# EAGLE board v0 (EAGLE 8.3.2)
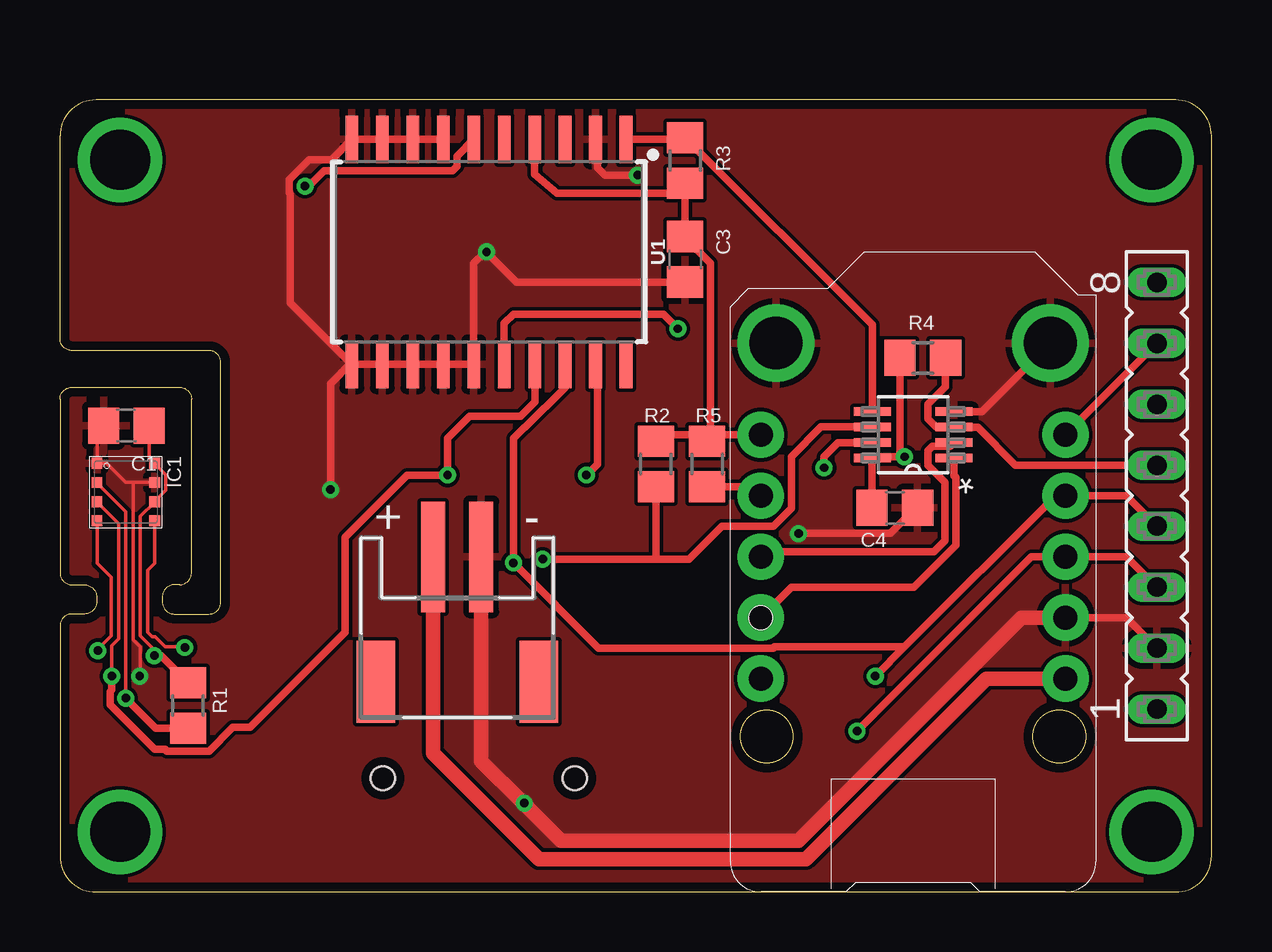
[diagram p0: board, top side]
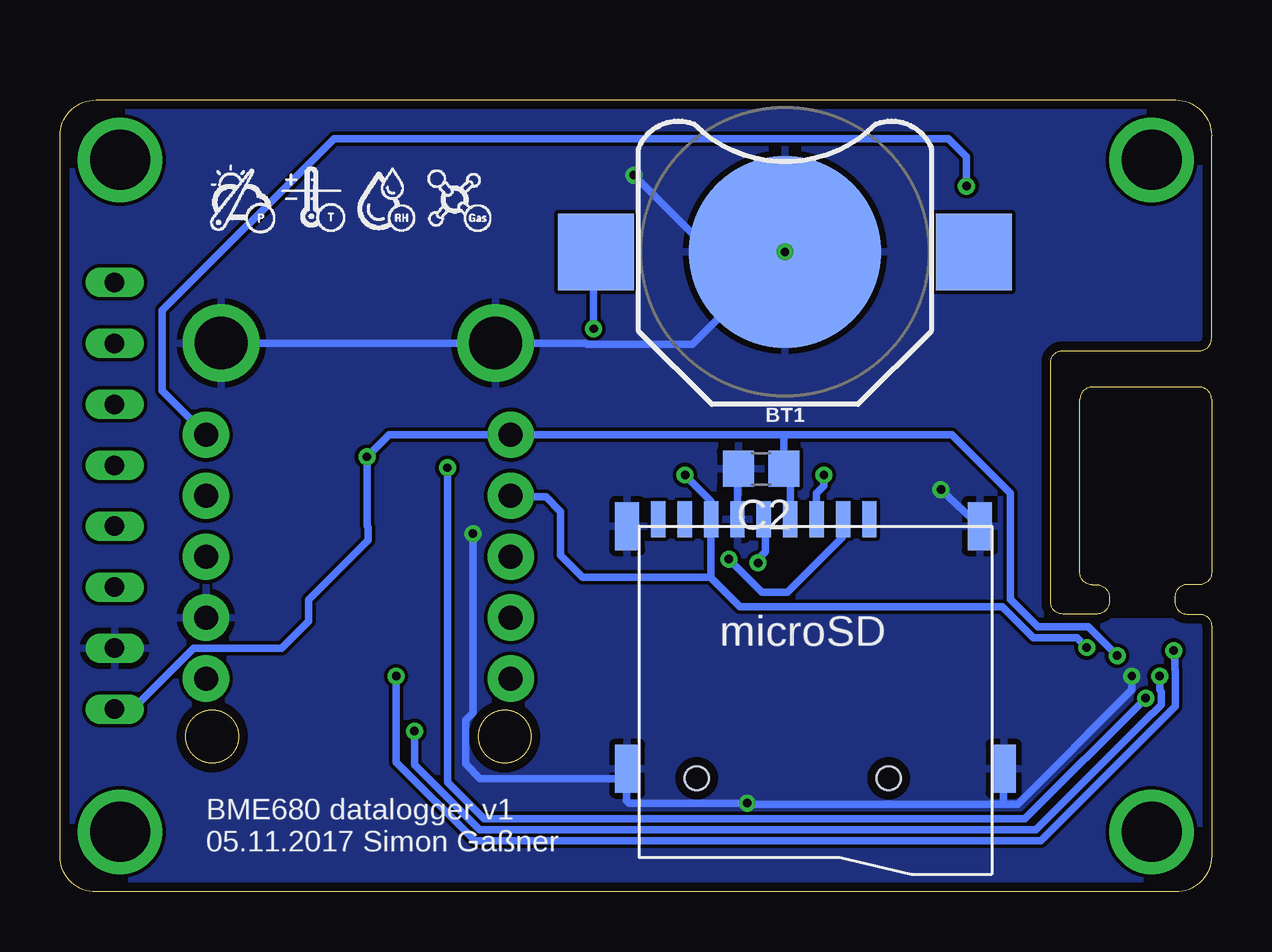
[diagram p1: board, bottom side, seen from below]

Size 48 x 33 mm. Coordinates in mm from the lower left corner, seen from the top.
Outline: 6.21,22.55 0.5,22.55 arc-90 0,23.05 0,31.5 arc-90 1.5,33 46.5,33 arc-90 48,31.5 48,1.5 arc-90 46.5,0 1.5,0 arc-90 0,1.5 0,11.08 arc-90 0.5,11.58 1.02,11.58 arc90 1.52,12.08 1.52,12.3 arc90 1.02,12.8 0.5,12.8 arc-90 0,13.3 0,20.53 arc-90 0.5,21.03 4.99,21.03 arc-90 5.49,20.53 5.49,13.3 arc-90 4.99,12.8 4.77,12.8 arc90 4.27,12.3 4.27,12.08 arc90 4.77,11.58 6.21,11.58 arc90 6.71,12.08 6.71,22.05 arc90 6.21,22.55
Copper layers (1*16): Top 0.0356mm / dielectric 1.5011mm / Bottom 0.0356mm
Design rules "oshpark-2layer *": minimum track width 6mil, minimum drill 13mil, track to track 6mil, track to pad 6mil, pad to pad 6mil, via to via 6mil, smd to smd 6mil, copper to edge 15mil, drill to drill 6mil, minimum pad ring 7mil, minimum via ring 7mil, stop-mask expansion 2.5mil, vias tented up to drill 14mil, thermal gap 10mil
bRestrict: area 0,11.6 to 5.5,21

## Footprints (pad centres in the part's own frame; a part is rotated, then mirrored left to right if it is on the bottom)
BATTCON_12MM = smd 8 x 8: GND 0,0 | smd 3.175 x 3.175: PWR@1 -7.874,0; PWR@2 7.874,0
C0805 = smd 1.3 x 1.5: 1 -0.95,0; 2 0.95,0
JST-PH-2-SMT-RA = smd 1 x 4.6: 1 1,-3.7; 2 -1,-3.7 | smd 1.6 x 3.4: NC1 -3.4,1.5; NC2 3.4,1.5
BME680 = smd 0.45 x 0.45: 1 -1.2,-1.2; 2 -0.4,-1.2; 3 0.4,-1.2; 4 1.2,-1.2; 5 1.2,1.2; 6 0.4,1.2; 7 -0.4,1.2; 8 -1.2,1.2
R0805 = smd 1.3 x 1.5: 1 -0.95,0; 2 0.95,0
FE08 = drill 0.813 long: 1 -8.89,0; 2 -6.35,0; 3 -3.81,0; 4 -1.27,0; 5 1.27,0; 6 3.81,0; 7 6.35,0; 8 8.89,0
SO20-0.3 = smd 0.53 x 1.98: 1 -5.715,-4.685; 2 -4.445,-4.685; 3 -3.175,-4.685; 4 -1.905,-4.685; 5 -0.635,-4.685; 6 0.635,-4.685; 7 1.905,-4.685; 8 3.175,-4.685; 9 4.445,-4.685; 10 5.715,-4.685; 11 5.715,4.685; 12 4.445,4.685; 13 3.175,4.685; 14 1.905,4.685; 15 0.635,4.685; 16 -0.635,4.685; 17 -1.905,4.685; 18 -3.175,4.685; 19 -4.445,4.685; 20 -5.715,4.685
SOP65P400X130-8N = smd 1.549 x 0.356: 1 -1.702,0.965; 2 -1.702,0.33; 3 -1.702,-0.33; 4 -1.702,-0.965; 5 1.702,-0.965; 6 1.702,-0.33; 7 1.702,0.33; 8 1.702,0.965
MR**-AP*03** = smd 0.6 x 1.5: CARD_DETECTION -6.55,0.3; CLK -2.15,0.3; CMD 0.05,0.3; DAT0 -4.35,0.3; DAT1 -5.45,0.3; DAT2 2.25,0.3; DAT3/CS 1.15,0.3; GND -3.25,0.3; VCC -1.05,0.3 | smd 1 x 2: SHD_1 -7.85,0; SHD_2 6.85,0; SHD_3 -7.85,-10.1; SHD_4 7.85,-10.1 | hole 1: -4.95,-10.5; 3.05,-10.5
TRINKET_M0 = drill 1 pad 1.93: 1 -6.35,3.81; 2 -6.35,1.27; 3 -6.35,-1.27; 4 -6.35,-3.81; 5 -6.35,-6.35; 6 6.35,-6.35; 7 6.35,-3.81; 8 6.35,-1.27; 9 6.35,1.27; 10 6.35,3.81 | drill 2.2: 11 -5.715,-10.173; 12 5.715,-10.173

## Placement (x,y rotation side)
BT1  [BATTCON_12MM]  17.78,26.67 0 bottom
C1  100n  [C0805]  2.77,19.43 180 top
C2  100n  [C0805]  18.77,17.63 180 bottom
C3  100n  [C0805]  26.06,26.37 270 top
C4  100n  [C0805]  34.8,16 0 top
CN1  [JST-PH-2-SMT-RA]  16.56,10.26 180 top
IC1  BME680  [BME680]  2.74,16.66 270 top
R1  10k  [R0805]  5.33,7.77 90 top
R2  10k  [R0805]  24.84,17.83 90 top
R3  10k  [R0805]  26.06,30.48 270 top
R4  10k  [R0805]  35.97,22.25 180 top
R5  10k  [R0805]  26.97,17.83 90 top
SV1  [FE08]  45.72,16.51 90 top
U1  DS3234  [SO20-0.3]  17.88,26.67 180 top
U2  SN74LVC1G139DCTR  [SOP65P400X130-8N]  35.56,19.05 180 top
U$1  MICROSD_CARD_POLLIN  [MR**-AP*03**]  16.51,15.24 0 bottom
U$8  TRINKET_M0  [TRINKET_M0]  35.56,12.7 180 top
U$14  [BME680_LOGO]  41.91,27.28 0 bottom

## Library data of the parts
BT1 = SparkFun-Batteries; PROD_ID: BATT-08044; SF_SKU: PRT-10592
C1-C4 R1-R5 = rcl
CN1 = adafruit
IC1 = bosch-bme680
SV1 = con-lsta; OC_FARNELL: unknown; OC_NEWARK: unknown
U1 = SparkFun-Clocks; PROD_ID: IC-10016; SF_ID: COM-10079
U2 = 000_Simons_Eigene; MPN: SN74LVC1G139DCTR; OC_FARNELL: Unknown; OC_NEWARK: 94T5046; PACKAGE: SSOP-8; SUPPLIER: TEXAS INSTRUMENTS
U$1 = 000_eigene_Bauteile
U$8 U$14 = 000_Simons_Eigene

## Nets
3.3V: C1.1 C2.1 C3.1 C4.1 IC1.6 IC1.8 R1.2 R2.2 R3.2 R4.2 R5.2 SV1.1 U1.4 U2.8 U$1.VCC U$8.6
CS0: IC1.2 R1.1 U2.7
CS1: R2.1 U2.6 U$1.DAT3/CS
CS2: R3.1 U1.1 U2.5
CS3: R4.1 SV1.5 U2.3
CSD0: U2.1 U$8.9
CSD1: U2.2 U$8.8
GND: BT1.GND C1.2 C2.2 C3.2 C4.2 CN1.2 IC1.1 IC1.7 SV1.2 U1.2 U1.7 U1.8 U1.9 U1.10 U1.11 U1.12 U1.13 U1.14 U1.15 U2.4 U$1.GND U$1.SHD_1 U$1.SHD_2 U$1.SHD_3 U$1.SHD_4 U$8.2 U$8.11 U$8.12
MISO: IC1.5 R5.1 U1.19 U$1.DAT0 U$8.7
MOSI: IC1.3 SV1.3 U1.17 U$1.CMD U$8.3
N$1: BT1.PWR@1 U1.16
RST: SV1.7 U1.6 U$8.5
SCK: IC1.4 SV1.4 U1.18 U$1.CLK U$8.4
V_BAT: CN1.1 U$8.1

## Tracks (layer width: path | path; a pad name or v marks a point on that pad's centre or on a via)
3.3V  (via drill 0.35)
  Top 0.152: C1.1 3.72,18.09 IC1.8 3.94,17.84 4.4,17.38 4.4,16.74 3.94,16.29 IC1.6 3.94,16.24 3.35,15.64 3.35,10.67 3.96,10.06 3.93,10.03 v3.93,9.85
  Top 0.305: C4.1 33.85,18.07 U2.8 33.91,18.14 v35.2,18.14 35.02,18.32 R4.2 | 27.24,19.05 R5.2 | 27.24,19.05 U$8.6 | R1.2 4.21,9.85 v3.93,9.85 | R2.2 25.11,19.05 27.24,19.05 | U1.4 19.79,29.9 20.73,29.11 26.63,29.11 R3.2 C3.1 26.06,27.25 27.11,26.19 27.11,19.18 27.24,19.05
  Bottom 0.305: U$1.VCC 17.56,17.37 C2.1 | 17.72,17.53 C2.1 | 17.83,19.05 U$8.6 34.29,19.05 v35.2,18.14 35.2,15.26 35.16,15.21 35.16,14.66 37.64,12.18 37.64,11.28 38.76,10.16 42.44,10.16 44.98,7.62 SV1.1 | C2.1 17.83,19.05 | v3.93,9.85 5.14,11.05 7.24,11.05 8.38,12.19 8.38,16.61 10.82,19.05 17.83,19.05
CS0  (via drill 0.35)
  Top 0.152: IC1.2 1.54,17.04 2.74,15.84 v2.74,8.08
  Top 0.305: U2.7 32.44,18.72 31.85,18.14 v31.85,17.68 | v2.74,8.08 4,6.82 R1.1
  Bottom 0.305: v31.85,17.68 31.85,4.57 30.33,3.05 7.77,3.05 v2.74,8.08
CS1  (via drill 0.35)
  Top 0.305: U2.6 31.73,19.38 30.48,18.14 30.48,15.98 29.74,15.24 27.58,15.24 26.21,13.87 24.84,13.87 | 24.84,13.87 v20.12,13.87 | R2.1 24.84,13.87
  Bottom 0.305: U$1.DAT3/CS 15.39,15.57 15.39,14.78 17.68,12.5 18.75,12.5 v20.12,13.87
CS2
  Top 0.305: U1.1 25.98,31.36 R3.1 33.86,23.63 U2.5
CS3
  Top 0.305: SV1.5 39.83,17.78 38.25,19.36 37.29,19.36 U2.3 36.51,19.38 36.18,19.71 36.18,20.32 36.92,21.05 R4.1
CSD0
  Top 0.305: U2.1 37.26,17.35 37.34,17.27 37.34,14.44 35.6,12.7 30.48,12.7 U$8.9
CSD1
  Top 0.305: U2.2 37.11,18.57 36.36,18.57 36.18,18.39 36.18,17.78 36.88,17.08 36.88,14.63 36.42,14.17 29.41,14.17 U$8.8
GND  (via drill 0.35)
  Top 0.152: C1.2 1.54,19.16 IC1.1 1.95,17.86 2.74,17.07 IC1.7 | v3.33,8.99 3.35,9.02 3.35,10.21 3.05,10.52 3.05,17.07
  Top 0.305: U$8.2 44.45,11.43 SV1.2 | v19.36,3.71 19.31,3.71 19.28,3.73 | U1.2 22.4,31.28 22.4,30.18 22.71,29.87 v24.08,29.87 | 17.8,26.64 BT1.GND | 17.8,26.64 19.04,25.41 C3.2 | 16,31.33 U1.7 U1.8 U1.9 U1.10 11.33,30.52 10.38,30.52 9.55,29.69 9.55,29.14 9.6,29.09 9.6,24.55 12.12,22.03 | 17.8,26.64 17.7,26.64 17.25,26.19 U1.15 U1.14 U1.13 U1.12 U1.11 12.12,22.03 | U2.4 38.42,20.02 U$8.11 | C4.2 35.68,16 34.62,14.95 30.8,14.95 v30.79,14.94 | v11.28,16.76 11.28,21.18 12.12,22.03
  Top 0.61: U$8.2 40.07,11.43 30.77,2.13 20.88,2.13 19.28,3.73 17.56,5.45 CN1.2
  Bottom 0.305: U$1.GND 19.76,17.59 C2.2 | v3.33,8.99 3.33,8.43 3.4,8.35 3.4,8.33 8.08,3.66 8.69,3.66 | 8.69,3.66 8.69,5.11 U$1.SHD_4 | 8.69,3.66 19.31,3.66 v19.36,3.71 24.28,3.71 24.38,3.81 24.38,4.88 | 24.38,4.88 24.38,5.12 U$1.SHD_3 | v24.08,29.87 20.88,26.67 BT1.GND 21.64,22.81 26.03,22.81 26.09,22.87 U$8.12 U$8.11 | U$1.SHD_2 v11.28,16.76 | v30.79,14.94 30.79,7.47 31.1,7.15 31.1,5.34 30.48,4.72 24.54,4.72 24.38,4.88
  other vias: 17.78,26.67
  pour Top: 0,32.92 48.01,32.92 48.01,0 0,0
  pour Bottom: 0,32.92 48.01,32.92 48.01,0 0,0
MISO  (via drill 0.35)
  Top 0.152: IC1.5 3.94,13.7 3.66,13.41 3.66,10.82 3.84,10.64 3.96,10.64 4.39,10.21 5.18,10.21 v5.21,10.19
  Top 0.305: U1.19 22.4,21.91 22.4,17.83 v21.95,17.37 | U$8.7 28.84,16.88 R5.1
  Bottom 0.305: 20.86,13.09 19.66,11.89 8.72,11.89 7.43,10.59 5.61,10.59 v5.21,10.19 | 20.86,13.09 20.88,13.11 26.21,13.11 27.13,14.02 27.13,15.85 27.74,16.46 29.16,16.46 U$8.7 | 20.86,13.09 U$1.DAT0 20.86,16.29 v21.95,17.37
MOSI  (via drill 0.35)
  Top 0.152: IC1.3 1.54,16.24 2.44,15.34 2.44,10.54 2.16,10.27 v2.16,8.99
  Top 0.305: SV1.3 44.45,13.97 U$8.3 40.49,13.97 v33.22,6.71 | U1.17 19.81,21.96 19.81,20.42 19.2,19.81 17.07,19.81 16.15,18.9 v16.15,17.37 14.48,17.37 11.89,14.78 11.89,10.82 7.92,6.86 7.2,6.86 6.21,5.87 4.46,5.87 4.38,5.94 3.95,5.94 2.09,7.8 2.09,8.35 2.16,8.43 v2.16,8.99
  Bottom 0.305: v2.16,8.99 2.16,8.43 2.09,8.35 2.09,7.8 2.47,7.42 2.49,7.42 7.32,2.59 30.52,2.59 33.22,5.3 v33.22,6.71 | U$1.CMD 16.46,16.61 16.15,16.92 v16.15,17.37
N$1  (via drill 0.35)
  Top 0.305: U1.16 18.52,23.7 18.9,24.08 25.15,24.08 v25.76,23.47
  Bottom 0.305: v25.76,23.47 25.76,26.57 BT1.PWR@1
N$2  (via drill 2.5)
  other vias: 2.5,30.5
N$6  (via drill 2.5)
  other vias: 45.5,30.5
N$7  (via drill 2.5)
  other vias: 45.5,2.5
N$8  (via drill 2.5)
  other vias: 2.5,2.5
RST  (via drill 0.35)
  Top 0.305: U$8.5 SV1.7 | U1.6 16.55,30.66 16.55,30.24 16.37,30.06 11.01,30.06 10.36,29.41 v10.21,29.41
  Bottom 0.305: U$8.5 43.74,20.88 43.74,24.23 36.58,31.39 10.97,31.39 10.21,30.63 v10.21,29.41
SCK  (via drill 0.35)
  Top 0.152: IC1.4 1.54,13.7 2.13,13.11 2.13,10.67 1.58,10.12 v1.58,10.06
  Top 0.305: SV1.4 44.45,16.51 U$8.4 41.5,16.51 35.2,10.21 | 35.2,10.21 v33.98,8.99 | 35.2,10.21 29.79,10.21 29.74,10.16 22.45,10.16 v18.9,13.72 18.9,18.9 19.36,19.36 19.39,19.36 21.06,21.02 U1.18
  Bottom 0.305: v33.98,8.99 33.98,5.41 30.71,2.13 7.11,2.13 1.5,7.74 1.5,9.26 1.52,9.28 1.52,10 v1.58,10.06 | U$1.CLK 18.59,15.47 18.59,14.17 18.9,13.87 v18.9,13.72
V_BAT
  Top 0.61: U$8.1 38.61,8.89 31.09,1.37 19.96,1.37 15.56,5.78 CN1.1

## Text on the board
bPlace: BME680 datalogger v1 / 05.11.2017 Simon Gaßner